# Altium PCB PCB1.PcbDoc
Units mil, origin at the board's own origin, x right, y up, seen from the top; angles counter-clockwise.
Board outline 2832 x 1395 mil, 2 copper layers (Top Layer, Bottom Layer), stack 60.4 mil thick; 7 components, 10 nets, 59 pads, 0 vias.
Unrouted connection lines stored in the file: 24.
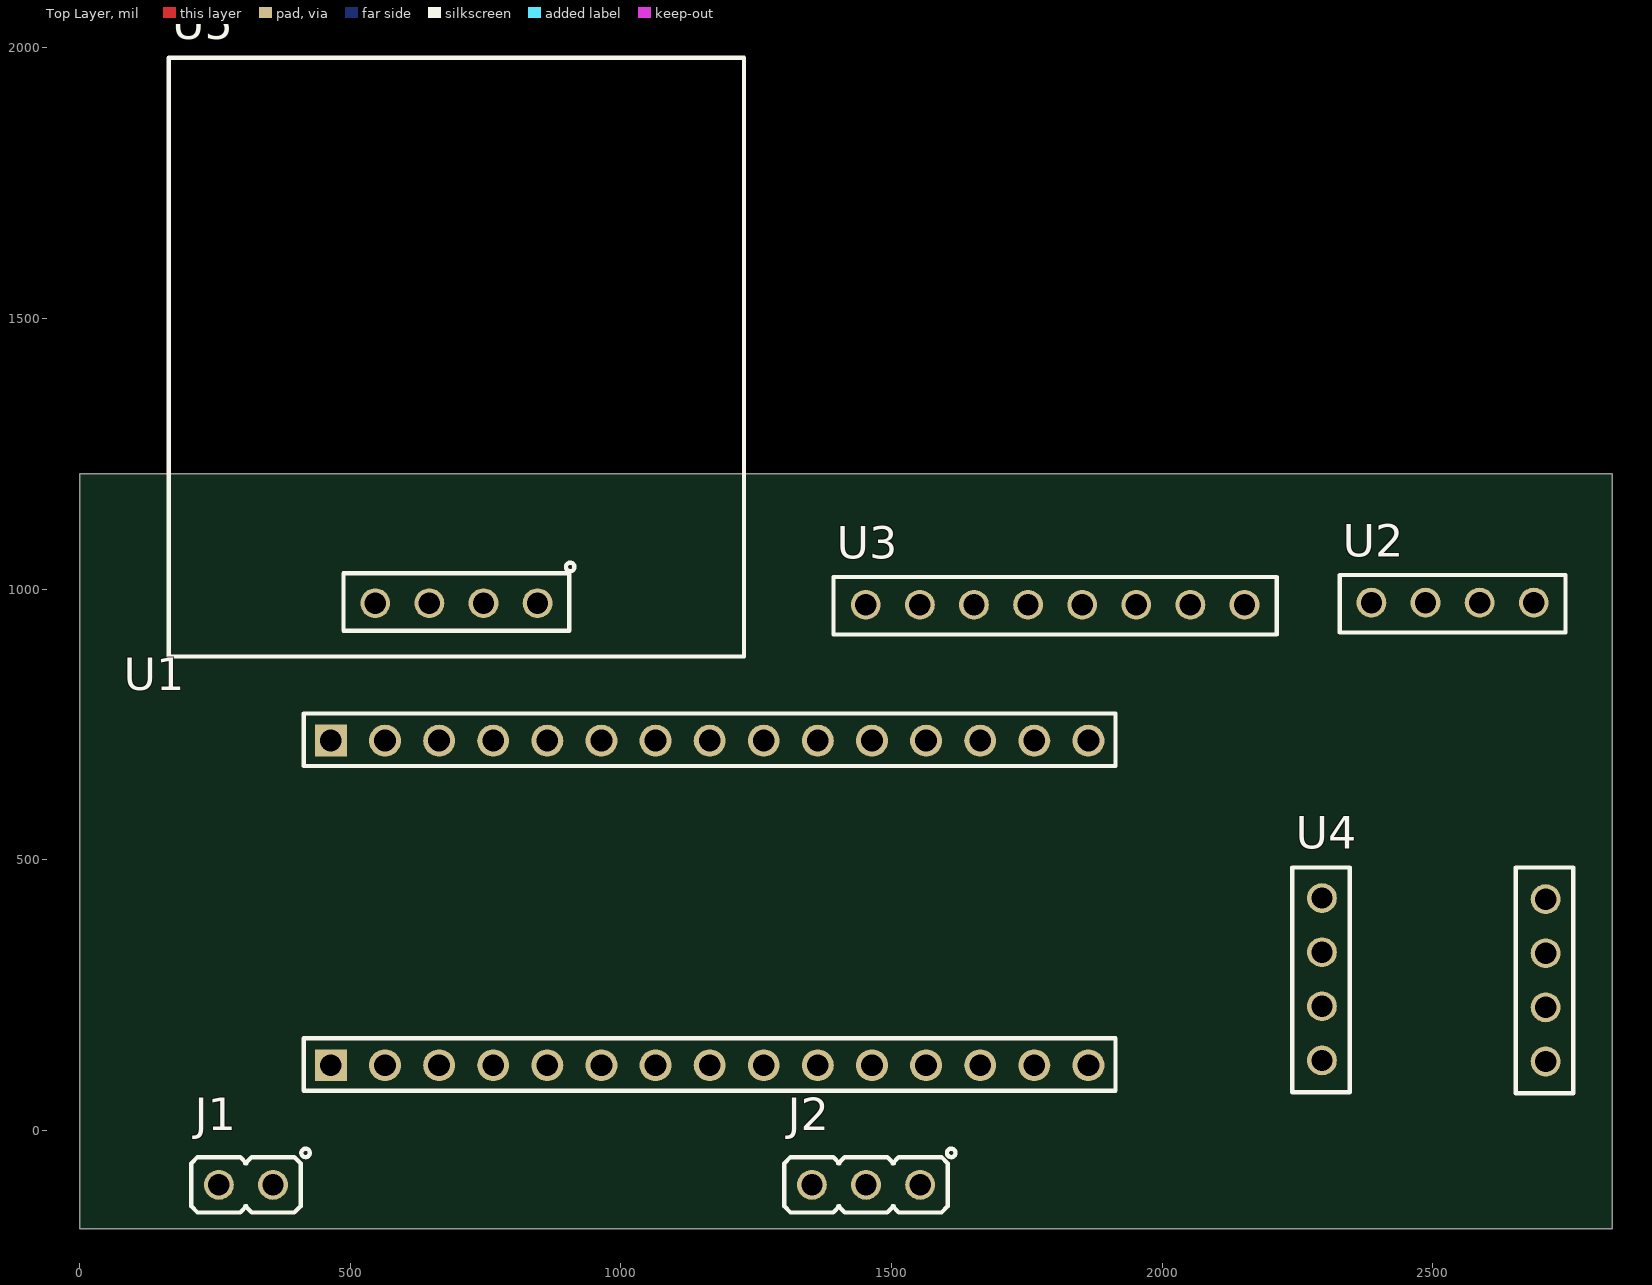
[diagram p0: Top Layer view]
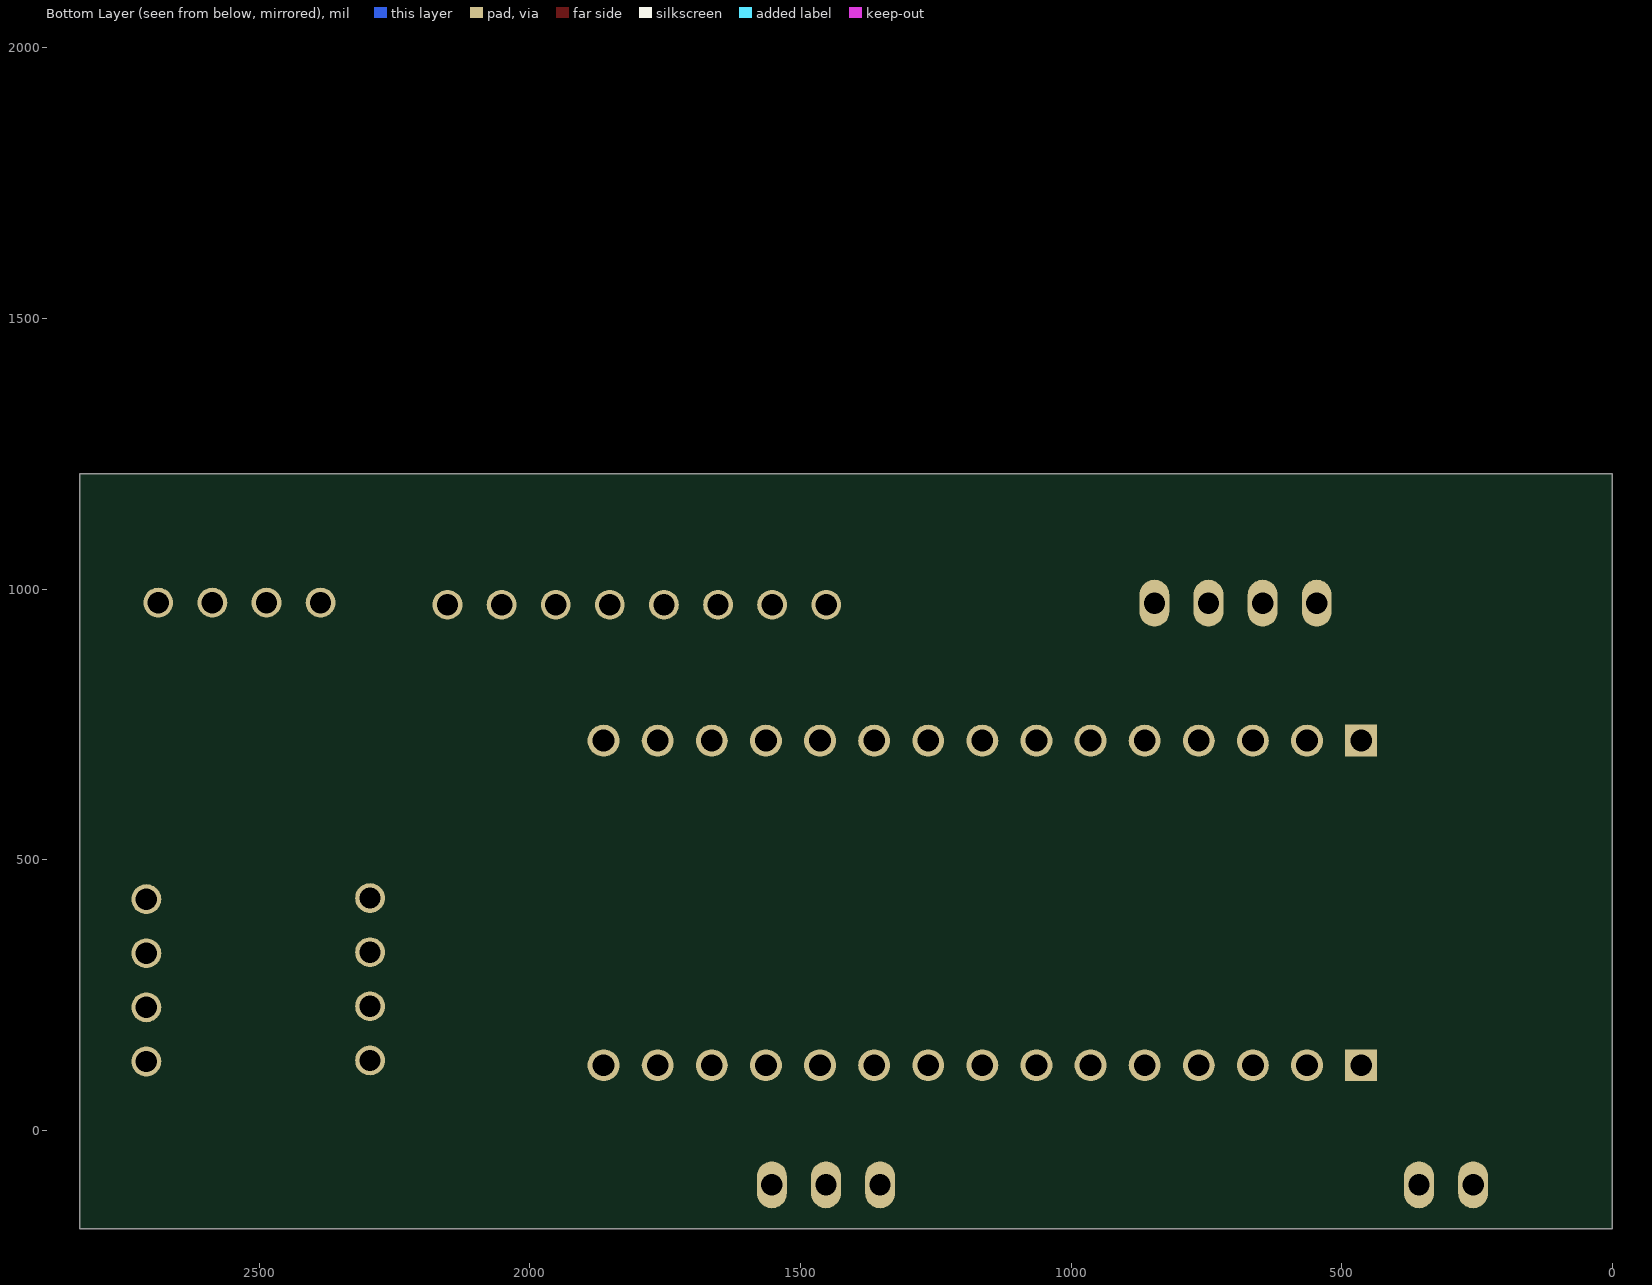
[diagram p1: Bottom Layer view, seen from below]

## Layer stack, top to bottom
Top Solder: solder mask 0.5, Solder Resist, Dk 3.3
Top Layer: signal copper 0.7
Dielectric1: core 59, FR-4, Dk 4.3
Bottom Layer: signal copper 0.7
Bottom Solder: solder mask 0.5, Solder Resist, Dk 3.3

## Board outline
0,-182 2832,-182 2832,1213 0,1213

## Design rules (kind name [scope] priority, off if disabled: settings)
Clearance [All] p1: gap=10 ignorepadtopadclearanceinfootprint=FALSE
DiffPairsRouting [All] p1: maxlimit=10 minlimit=10 mostfreqgap=10 toplayer_minwidth=10 toplayer_maxwidth=10 toplayer_prefwidth=10 bottomlayer_minwidth=10 bottomlayer_maxwidth=10 bottomlayer_prefwidth=10 maxuncoupledlength=500
HoleSize [All] p1: absolutevalues=TRUE maxlimit=300 minlimit=10 maxpercent=80.000 minpercent=20.000
MinimumAnnularRing [All] p1: minimumring=10
PasteMaskExpansion [All] p1: expansion=10
PlaneClearance [All] p1: clearance=15
PlaneConnect [All] p1: pad.planeconnectstyle=Relief pad.reliefexpansion=20 pad.reliefentries=4 pad.reliefconductorwidth=10 pad.reliefairgap=10 via.planeconnectstyle=Direct via.reliefexpansion=20 via.reliefentries=4 via.reliefconductorwidth=10 via.reliefairgap=10
PolygonConnect [All] p1: thpad.connectstyle=Relief thpad.reliefconductorwidth=10 thpad.reliefentries=4 thpad.polygonreliefangle="90 Angle" thpad.airgapwidth=10 smdpad.connectstyle=Relief smdpad.reliefconductorwidth=10 smdpad.reliefentries=4 smdpad.polygonreliefangle="90 Angle" smdpad.airgapwidth=10 via.connectstyle=Direct via.reliefconductorwidth=10 via.reliefentries=4 via.polygonreliefangle="90 Angle" via.airgapwidth=10
RoutingVias [All] p1: holewidth=10 width=20 viastyle="Through Hole" minholewidth=10 minwidth=20 maxholewidth=10 maxwidth=20
SMDNeckDown [All] p1: percent=100.000
SilkToSolderMaskClearance SilkscreenOverComponentPads [IsPad] p1: minsilkscreentomaskgap=10 clearancetoexposedcopper=TRUE
SolderMaskExpansion [All] p1: expansion=10 istentingtop=FALSE
Width [All] p1: maxlimit=10 minlimit=10 preferedwidth=10
24 further rules are at their usual default settings.

## Components (designator, comment, footprint, x,y, rotation, side; value= is the part's Value field where it differs from the comment)
J1 "HDRM2" HDR_M_1X2 307,-101 r180 top
J2 "HDRM3" HDR_M_1X3 1453,-101 r180 top
U1 "STM32L412KB" NUCLEO32 1013.18,421.27 r90 top
U2 "GY-906" GY-906 2539.01,964.17 r0 top
U3 "MPU-6050" MPU-6050 1798,968 r0 top
U4 "MAX30102" max30102 2477.7,273.02 r270 top
U5 "OLED_SSD1306" OLED_SSD1306_64_I2C 696,974 r180 top

## Footprints (in the part's own frame and the unit in brackets; to place one, negate y for a bottom-side part, rotate by r counter-clockwise, add the part's x,y. Pads: shape width x height; smd on the part's side, far side on the other; paste and mask are expansions set on the pad)
GY-906 [mm]
  round 1.4 hole 1 mask+0.1: 1(-3.861,0.275) 2(-1.321,0.275) 3(1.219,0.275) 4(3.759,0.275)
  silkscreen extent -5.35,-1.12 5.25,1.58, body extent -5.26,-1.02 5.15,1.48, height 8.5
HDR_M_1X2 [mm] "Connector; Header; 2 Position"
  round 1.4 / inner round 1.4 / far side oval 1.4x2.2 hole 1 mask+0.1: 1(-1.27,0) 2(1.27,0)
  silkscreen extent -3,-1.7 2.57,1.3, body extent -2.54,-1.25 2.44,1.25, height 8.72
HDR_M_1X3 [mm] "Connector; Header; 3 Position"
  round 1.4 / inner round 1.4 / far side oval 1.4x2.2 hole 1 mask+0.1: 1(-2.54,0) 2(0,0) 3(2.54,0)
  silkscreen extent -4.2,-1.7 3.84,1.3, body extent -3.78,-1.27 3.84,1.27, height 8.54
max30102 [mm]
  round 1.4 hole 1 mask+0.1: 1(-3.961,-4.625) 2(-1.421,-4.625) 3(1.119,-4.625) 4(3.659,-4.625) 5(3.709,5.875) 6(1.169,5.875) 7(-1.371,5.875) 8(-3.911,5.875)
  silkscreen extent -5.4,-6.02 5.2,7.18, body extent -5.36,-5.92 5.1,7.08, height 8.5
MPU-6050 [mm]
  round 1.4 hole 1 mask+0.1: 1(-8.776,0.079) 2(-6.236,0.079) 3(-3.696,0.079) 4(-1.156,0.079) 5(1.384,0.079) 6(3.924,0.079) 7(6.464,0.079) 8(9.004,0.079)
  silkscreen extent -10.29,-1.32 10.51,1.38, body extent -10.17,-1.22 10.4,1.28, height 8.5
NUCLEO32 [mm]
  rect 1.5x1.5 hole 1.02: 1(-7.652,13.949) 30(7.588,13.949)
  round 1.5 hole 1.02: 2(-7.652,11.409) 3(-7.652,8.869) 4(-7.652,6.329) 5(-7.652,3.789) 6(-7.652,1.249) 7(-7.652,-1.291) 8(-7.652,-3.831) 9(-7.652,-6.371) 10(-7.652,-8.911) 11(-7.652,-11.451) 12(-7.652,-13.991) 13(-7.652,-16.531) 14(-7.652,-19.071) 15(-7.652,-21.611) 16(7.588,-21.611) 17(7.588,-19.071) 18(7.588,-16.531) 19(7.588,-13.991) 20(7.588,-11.451) 21(7.588,-8.911) 22(7.588,-6.371) 23(7.588,-3.831) 24(7.588,-1.291) 25(7.588,1.249) 26(7.588,3.789) 27(7.588,6.329) 28(7.588,8.869) 29(7.588,11.409)
  silkscreen extent -8.85,-22.88 8.86,15.23, body extent -9.35,-28.08 9.19,23.93, height 10.57
OLED_SSD1306_64_I2C [mm] "OLED SS1306 Breakout, 128X64, I2C"
  round 1.4 / inner round 1.4 / far side oval 1.4x2.2 hole 1 mask+0.1: 1(-3.81,0) 2(-1.27,0) 3(1.27,0) 4(3.81,0)
  silkscreen extent -13.5,-25.6 13.5,2.5, body extent -13.35,-25.5 13.35,2.36, height 13.97

## Part data
J1: library part "Header Male THT 1x2", "CONN, HEADER, Male, pitch: 2.54mm, 2POS"
J2: library part "Header Male THT 1x3", "CONN, HEADER, Male, pitch: 2.54mm, 3POS"
U5: library part OLED_SSD1306_64_I2C, "MONOCHROME 1.3 128X64", Background Color=Black, Case/Package=Module, Manufacturer="Adafruit Industries", Manufacturer Part Number=326, Supplier Part Number 1=485-326, Category="LCD, OLED, Graphic Displays", ComponentLink1Description=https://datasheet.ciiva.com/6967/1718446-6967825.pdf?src-supplier=Newark, ComponentLink1URL=https://datasheet.ciiva.com/6967/1718446-6967825.pdf?src-supplier=Newark, ComponentLink2Description=https://datasheet.ciiva.com/39121/2211952-39121704.pdf?src-supplier=Jameco, ComponentLink2URL=https://datasheet.ciiva.com/39121/2211952-39121704.pdf?src-supplier=Jameco, ComponentLink3Description=https://learn.adafruit.com/downloads/pdf/monochrome-oled-breakouts.pdf?src-supplier=Digi-Key, ComponentLink3URL=https://learn.adafruit.com/downloads/pdf/monochrome-oled-breakouts.pdf?src-supplier=Digi-Key, Diagonal Size=0.96inch, Interface=I2C,SPI, Pricing 1="1=19.50000, 10=19.50000 (USD)", Pricing 2="1=19.95000, 10=19.95000 (USD)", Resolution (height)=64pixel, Resolution (width)=128pixel, RoHS=Yes, Stock 1=164, Stock 2=2128, Supplier 1=Mouser, Supplier 2=Mouser, Supplier Part Number 2=485-938

## Nets (pads, with @x,y where several pads share a name; then routed paths per layer and width w, separated by ;. In a path a pad name is that pad's centre, name@x,y a point inside that pad or via, vN(x,y) a via of type N, cw(c..) or ccw(c..) an arc to the next point about the centre after c; other vN are vias at no path point)
+3.3V: U1.17 U5.1
GND: J1.2 J2.1 U1.4 U1.29 U2.2 U3.2 U4.4 U4.8 U5.2
NetJ2_2: J2.2 U1.8
NetJ2_3: J2.3 U1.7
NetU1_6: U1.6 U4.5
SCL_I2C1: U1.1 U2.3 U3.3
SCL_I2C3: U1.25 U4.3 U5.3
SDA_I2C1: U1.2 U2.4 U3.4
SDA_I2C3: U1.15 U4.2 U5.4
VCC: J1.1 U1.30 U2.1 U3.1 U4.1
pads on no net: U1.3 U1.5 U1.9 U1.10 U1.11 U1.12 U1.13 U1.14 U1.16 U1.18 U1.19 U1.20 U1.21 U1.22 U1.23 U1.24 U1.26 U1.27 U1.28 U3.5 U3.6 U3.7 U3.8 U4.6 U4.7